# Altium PCB 20K Control Board V1.1.PcbDoc (part 23 of 24)
Units mm, origin at the board's own origin, x right, y up, seen from the top; angles counter-clockwise.
Board outline 132 x 260 mm, 4 copper layers (Top Layer, GND, VCC, Bottom Layer); 1384 components, 779 nets, 4515 pads, 1774 vias.
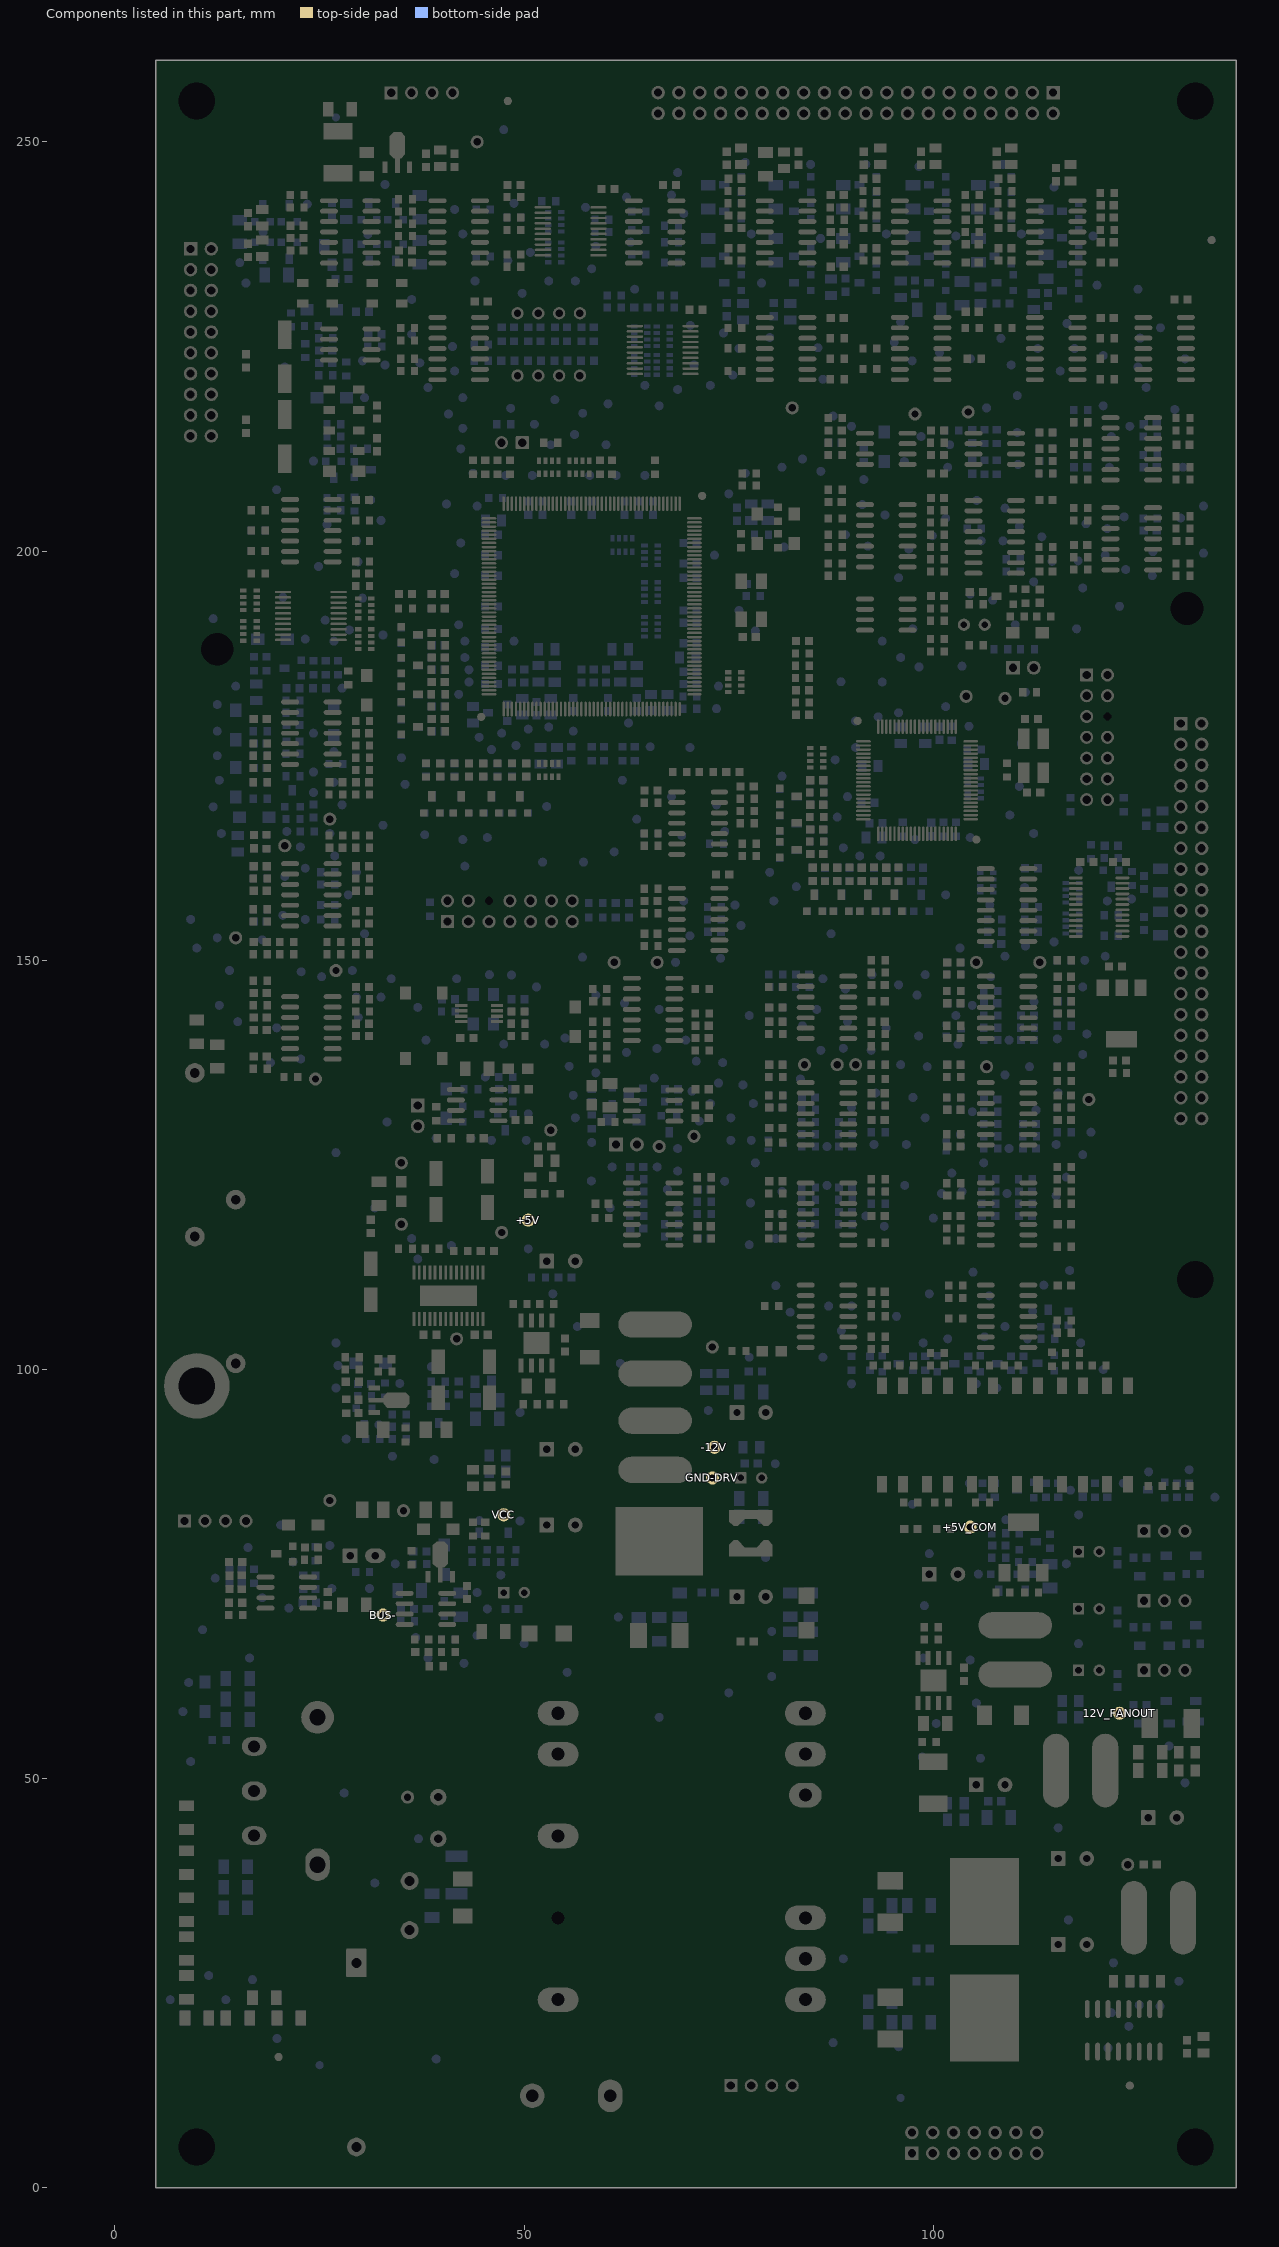
[diagram p25: the components of this part, seen from the top]

## Via types
v1: diameter 0.8, hole 0.4, Top Layer to Bottom Layer, tented both sides, 1354 vias
v2: diameter 1.2, hole 0.7, Top Layer to Bottom Layer, 261 vias
v3: diameter 0.8, hole 0.4, Top Layer to Bottom Layer, 58 vias
v4: diameter 1.2, hole 0.7, Top Layer to Bottom Layer, tented top, 58 vias
v5: diameter 0.8, hole 0.4, Top Layer to Bottom Layer, tented top, 22 vias
v6: diameter 1.2, hole 0.7, Top Layer to Bottom Layer, tented both sides, 13 vias
v7: diameter 1.2, hole 0.7, Top Layer to Bottom Layer, tented bottom, 8 vias

## Nets (pads, with @x,y where several pads share a name; then routed paths per layer and width w, separated by ;. In a path a pad name is that pad's centre, name@x,y a point inside that pad or via, vN(x,y) a via of type N, cw(c..) or ccw(c..) an arc to the next point about the centre after c; other vN are vias at no path point) (continued)
pads on no net: CNC3.6 CNC26.6 CNC27.1 MARK1.1 MARK2.1 MARK3.1 MARK4.1 MARK5.1 MARK6.1 MARK7.1 MARK8.1 MARK9.1 MARK10.1 MARK11.1 MARK12.1 QA5-HS.1 QA5-HS.2 SC1.1 SC2.1 SC3.1 SC4.1 SC5.1 SC7.1 SC8.1 TA1.6 UA10.2 UA10.3 UA11.2 UA11.3 UC4.23 UC20.81 UC20.82 UC20.149 UC23.8 UC46.1 UC46.2 UC46.7 UC46.8 UC46.13 UC46.14 UC46.15 UC46.16 UC46.19 UC46.20 UC46.21 UC46.26 UC46.27 UC73.38

## Polygon pours and split planes (outlines as drawn)
EARTH on Bottom Layer "EARTH" (solid, remove dead copper, pour order 1007): 15.25,102.5 16,101.75 16,98.25 11.75,94 6.75,94 6,94.75 6,101.75 6.75,102.5
GND on Bottom Layer "GND" (solid, remove dead copper, pour order 1001): 114,180.75 114.75,180 114.75,169.5 114,168.75 110.5,168.75 108,171.25 108,179 109.75,180.75
GND_S on Bottom Layer "GND-S" (solid, remove dead copper, pour order 1007): 82.25,35.25 86.25,35.25 87,34.5 87,31.5 86.25,30.75 82.25,30.75 81.75,31.25 81.75,34.75
NetCA104_1 on Bottom Layer "CA104-1" (solid, remove dead copper, pour order 1002): 94.75,37.75 97,37.75 97.5,37.25 97.5,32.5 96,31 94.5,31 94.25,31.25 94.25,37.25
NetCA91_1 on Bottom Layer "CA91-1" (solid, remove dead copper, pour order 1003): 94.5,23.75 95.5,23.75 97.5,21.75 97.5,16.75 97,16.25 94.75,16.25 94.25,16.75 94.25,23.5
NetCA77_2 on Bottom Layer "CA77-2" (solid, remove dead copper, pour order 1002): 54.25,115.25 54.5,115 54.5,112 54.75,111.75 54.75,110.75 54.5,110.5 52,110.5 51.75,110.75 51.75,114.75 52.25,115.25
GND on Bottom Layer "GND" (solid, remove dead copper, pour order 1005): 60.25,107.75 61,107 61,101.25 60,100.25 49.05,100.25 48.75,100.55 48.75,107.25 49.25,107.75
GND-DRV on Bottom Layer "GND-DRV" (solid, remove dead copper, pour order 1003): 49.5,90.25 49.75,90 49.75,86.75 49.5,86.5 47.55,86.5 47.25,86.8 47.25,90 47.5,90.25
GND on Bottom Layer "GND" (solid, remove dead copper, pour order 1004): 42.75,90.25 42.5,90 42.5,86.75 42.75,86.5 46.25,86.5 46.5,86.75 46.5,90 46.25,90.25
NetDA8_2 on Bottom Layer "DA8-2" (solid, remove dead copper, pour order 1002): 38.5,43.75 40.75,43.75 43.25,41.25 43.25,40 43,39.75 40,39.75 38,41.75 38,43.5 38.25,43.75
NetCA70_1 on Bottom Layer "CA70-1" (solid, remove dead copper, pour order 1001): 36.75,39.5 39,37.25 43.25,37.25 43.5,37 43.5,35.5 43,35 34,35 33.25,35.75 33.25,38.75 34,39.5
BUS+ on Bottom Layer "BUS+" (solid, remove dead copper, pour order 1000): 31,32.25 32.75,32.25 34.25,33.75 37.5,33.75 40.95,33.75 41,33.75 44,30.75 43.25,30 35.5,30 32.25,30 30.5,31.75
GND-DRV on Bottom Layer "GND-DRV" (solid, remove dead copper, pour order 1000): 72.25,89.25 71.75,88.75 71.75,85.75 73,84.5 73,82.25 73,80.5 77.25,80.5 77.5,80.75 77.5,89 77.25,89.25
GND-DRV on Bottom Layer "GND-DRV" (solid, remove dead copper, pour order 1001): 73,71.75 73.5,71.25 76.75,71.25 77.5,72 77.5,82.25 73,82.25
GND on Bottom Layer "GND" (solid, remove dead copper, pour order 1001): 47.25,120 48.25,119 48.25,114.75 46.25,112.75 42,112.75 42,115.75 40,117.75 37,117.75 36.75,118 36.75,119.75 37,120
GND on Bottom Layer "GND" (solid, remove dead copper, pour order 1000): 74.5,198.25 79.75,198.25 80.5,197.5 80.5,189 79.75,188.25 74.75,188.25 74,189 74,197.75 74.5,198.25
NetCA6_1 on Bottom Layer "CA83-1" (solid, remove dead copper, pour order 1009): 81.5,70.5 81.5,67.5 81.75,67.25 85.75,67.25 86,67.5 86,70.25 85.75,70.5
+5V on Bottom Layer "+5V" (solid, remove dead copper, pour order 1006): 41.25,104.5 43.25,104.5 44.75,103 44.75,101.5 44.5,101.25 41.75,101.25 41,102 40.75,102.25 40.75,104 41.25,104.5
+12V_FB on Bottom Layer "+12V-FB" (solid, remove dead copper, pour order 1005): 52.25,95.25 49.75,92.75 49.75,79.75 57.5,72 72.25,72 72.5,72.25 72.5,84.25 64.75,92 64.75,94.5 64,95.25
+12V on Bottom Layer "+12V" (solid, remove dead copper, pour order 1001): 72,103.75 74.5,103.75 75,103.25 75,99.25 74.75,99 71.75,99 71.5,99.25 71.5,103.25 72,103.75
NetCA73_2 on Bottom Layer "CA73-2" (solid, remove dead copper, pour order 1000): 72,98 75.25,98 75.75,98.5 75.75,99.75 76.25,100.25 78,100.25 78,99 77,98 77,94.25 76.5,93.75 72.25,93.75 71.5,94.5 71.5,97.5
NetDA13_1 on Bottom Layer "DA13-1" (solid, remove dead copper, pour order 1014): 88.25,30.25 89.25,31.25 89.25,35.25 91.5,37.5 92.5,37.5 93,37 93,26.5 92.25,25.75 82.25,25.75 81.75,26.25 81.75,29.75 82.25,30.25
NetRC185_2 on Bottom Layer "RC185-2" (solid, remove dead copper, pour order 1008): 14.25,122 8.75,122 8,121.25 8,115.5 8.5,115 11,115 16,120 16,121.5 15.5,122
GND_S on Bottom Layer "GND-S" (solid, remove dead copper, pour order 1000): 108.25,51.5 111,51.5 111.5,51 111.5,45 110.75,44.25 108,44.25 107.75,44.5 107.75,51 108.25,51.5
NetCA68_1 on Bottom Layer "CA68-1" (solid, remove dead copper, pour order 1023): 63,70.5 70,70.5 70.25,70.25 70.25,69.5 70.25,69.25 70,69 62.75,69 62.5,69.25 62.5,70.25 62.75,70.5
NetCA82_2 on Bottom Layer "CA82-2" (solid, remove dead copper, pour order 1022): 78.5,91.5 80.75,91.5 81.5,90.75 81.5,81.25 80.75,80.5 78.75,80.5 78.25,80.5 78,80.75 78,91.25 78.25,91.5
GND-DRV on Bottom Layer "GND-DRV" (solid, remove dead copper, pour order 1021): 86.25,54.5 80.75,54.5 76.75,58.5 76.75,65.25 76.75,73.75 76.25,74.25 73.5,74.25 73,73.75 73,56.75 78.25,51.5 86.75,51.5 87,51.75 87,54.25 86.75,54.5
NetDA5_1 on Bottom Layer "DA5-1" (solid, remove dead copper, pour order 1020): 63,67.5 69.5,67.5 70.25,66.75 70.25,56 76.75,49.5 86.25,49.5 86.5,49.25 86.5,47.25 85.5,46.25 71.75,46.25 62.5,55.5 62.5,67 63,67.5
BUS+ on Bottom Layer "BUS+" (solid, remove dead copper, pour order 1015): 25 vertices, not listed, extent 26.75,9.75 57.5,32.25
GND_FAN on Bottom Layer "GND-FAN" (solid, remove dead copper, pour order 1013): 117.5,60.25 120,60.25 121,59.25 121.25,59 121.25,57.75 121.25,57 121,56.75 117.5,56.75 117.25,57 117.25,60 117.5,60.25
GND_S on Bottom Layer "GND-S" (solid, remove dead copper, pour order 1012): 112.75,60.25 112.25,59.75 112.25,56.75 112.5,56.5 116,56.5 116.25,56.75 116.25,60 116,60.25
GND_S on Bottom Layer "GND-S" (solid, remove dead copper, pour order 1011): 96.5,29.75 95.25,28.5 95.25,26 96.5,24.75 98.5,24.75 98.5,26.5 98.75,26.75 98.75,28.25 98.5,28.5 98.5,29.75
GND_S on Bottom Layer "GND-S" (solid, remove dead copper, pour order 1008): 97.25,68.5 98,69.25 103.25,69.25 104,68.5 104,60 103.5,59.5 98.25,59.5 97.25,60.5
NetFA3_2 on Bottom Layer "FA3-2" (solid, remove dead copper, pour order 1007): 101.75,49.75 102.25,49.25 102.25,44.5 102,44.25 98.5,44.25 98.25,44.5 98.25,49.5 98.5,49.75
NetCA98_1 on Bottom Layer "CA98-1" (solid, remove dead copper, pour order 1006): 106.75,51.5 107.25,51 107.25,44.5 107,44.25 103.5,44.25 103.25,44.5 103.25,51 103.75,51.5
NetCA92_1 on Bottom Layer "CA92-1" (solid, remove dead copper, pour order 1004): 126.75,29 126.75,38.5 124,41.25 124,46.5 124.5,47 127.75,47 128.5,46.25 128.5,44 132.25,40.25 132.25,29 131.5,28.25 127.5,28.25
NetDA11_1 on Bottom Layer "DA11-1" (solid, remove dead copper, pour order 1000): 82.25,24.5 92,24.5 92.75,23.75 92.75,16.25 92,15.5 82.5,15.5 81.75,16.25 81.75,24 82.25,24.5
NetDA10_2 on Bottom Layer "DA10-2" (solid, remove dead copper, pour order 1008): 82,65.75 85.75,65.75 86,65.5 86,59.5 87,58.5 87,57 86.5,56.5 81.75,56.5 81,57.25 81,65.25 81.5,65.75
NetCA1_2 on Bottom Layer "CA1-2" (solid, remove dead copper, pour order 1010): 112.5,30.75 112.5,33 115,35.5 119.75,35.5 121.75,37.5 122.5,37.5 123,37 123,31.75 122.5,31.25 117.5,31.25 117,30.75 116.25,30 114.25,30 112.5,30
NetCA2_1 on Bottom Layer "CA2-1" (solid, remove dead copper, pour order 1010): 99,41.25 101.25,43.5 114.25,43.5 116,41.75 116,38 111.5,33.5 111.5,28.75 110.5,27.75 100,27.75 99,28.75
NetCA2_1 on Bottom Layer "1" (solid, remove dead copper, pour order 1005): 110,42.25 113.25,45.5 122.5,45.5 123,45 123,40.75 118.75,36.5 111.75,36.5 109.5,38.75 109.5,42.25
NetCA1_2 on Bottom Layer "CA1-2" (solid, remove dead copper, pour order 1011): 113,31.25 116.5,31.25 117,30.75 117,13 115.5,11.5 99.75,11.5 99,12.25 99,25.75 100,26.75 111,26.75 112.5,28.25 112.5,30.75
NetCA1_2 on Bottom Layer "CA1-2" (solid, remove dead copper, pour order 1012): 117,29.25 117,28.5 117.75,27.75 120,25.5 120,22.25 120,16 117,13 115.5,11.5 114.25,11.5 114.25,29.25
BUS- on Bottom Layer "BUS-" (solid, remove dead copper, pour order 1048): 62.25,13.75 62.75,13.25 62.75,2.75 61,1 26.5,1 25.75,1.75 25.75,7 26.25,7.5 30.25,7.5 33.75,4 57.25,4 59,5.75 59,13 59.75,13.75
BUS- on Bottom Layer "BUS-" (solid, remove dead copper, pour order 1016): 51.5,55 50,56.5 50,64.25 49.25,65 45.5,65 45,64.5 45,56 50,51 57.25,51 57.5,51.25 57.5,54.75 57.25,55
BUS- on Bottom Layer "BUS-" (solid, remove dead copper, pour order 1017): 11.75,40.5 11.25,40 11.25,29.25 11.75,28.75 16.25,28.75 16.5,29 16.5,31.5 16.25,31.75 14.75,31.75 14,32.5 14,40.25 13.75,40.5
NetCA79_1 on Bottom Layer "CA79-1" (solid, remove dead copper, pour order 1018): 47.5,73.75 46.75,73.75 45.75,72.75 43.5,70.5 42.75,70.5 40,70.5 39.75,70.25 39.75,69.25 40,69 47.25,69 48.25,70 48.25,73.5 48,73.75
NetCA4_1 on Bottom Layer "CA4-1" (solid, remove dead copper, pour order 1018): 78.75,78.75 81.75,78.75 86,74.5 86,72 81,72 80.25,71.25 78.75,71.25 78.25,71.75 78.25,78.25
1.5VREF on Bottom Layer "1.5VREF" (solid, remove dead copper, pour order 1000): 120.5,136.25 122,136.25 122.5,135.75 122.5,134.3 122.2,134 120,134 119.5,134.5 119.5,135.25 120.5,136.25
GND on Bottom Layer "GND" (solid, remove dead copper, pour order 1004): 48.25,108.5 49,107.75 54,107.75 54.75,107 54.75,101.5 53.5,100.25 46.5,100.25 45.5,101.25 45.5,103.5 43.75,105.25 41.25,105.25 41.25,110.75 42.25,111.75 48.25,111.75
GND on Bottom Layer "GND" (solid, remove dead copper, pour order 1019): 40.75,111.75 29.5,111.75 28.25,110.5 28.25,105.25 29,104.5 40.5,104.5 41.25,105.25 46,105.25 48.25,107.5 48.25,115 48,115.25 44.25,115.25
-12V on Bottom Layer "-12V" (solid, remove dead copper, pour order 1002): 77.25,90.5 77.25,92.75 77,93 76.75,93.25 69.5,93.25 69.286,93.25 69.018,92.982 69.018,90.982 70.25,89.75 77,89.75 77.25,90
GND on Bottom Layer "GND" (solid, remove dead copper, pour order 1003): 46.75,208.25 66.25,208.25 70.583,203.917 70.583,182.633 69.45,181.5 47,181.5 45.75,182.75 45.75,207.25 46.75,208.25
GND on Bottom Layer "GND" (solid, remove dead copper, pour order 1004): 94.25,177.5 103.75,177.5 104.75,176.5 104.75,167.25 103.75,166.25 92.5,166.25 91.75,167 91.75,176.25 93,177.5
NetDA9_1 on Bottom Layer "DA9-1" (solid, remove dead copper, pour order 1000): 53.75,69 57,69 57.75,68.25 57.75,57.75 56.5,56.5 52.25,56.5 51.5,57.25 51.5,63.75 53.5,65.75 53.5,68.75 53.75,69
GND-DRV on Bottom Layer "GND-DRV" (solid, remove dead copper, pour order 1006): 78.5,100.25 80.25,100.25 81.25,99.25 81.25,94.5 80.5,93.75 78.25,93.75 78,94 78,96.25 78.5,96.75
+5V on Bottom Layer "+5V" (solid, remove dead copper, pour order 1005): 77.25,109 85.25,101 88.75,101 89,100.75 89,97.25 88.75,97 84.5,97 74.75,106.75 70.5,106.75 70.25,107 70.25,108.75 70.5,109
+5V on Bottom Layer "+5V" (solid, remove dead copper, pour order 1003): 49.5,112 51,112 51.25,111.75 51.25,110.5 51.5,110.25 51.5,108.75 51.25,108.5 49.25,108.5 49,108.75 49,111.5
V19D on Bottom Layer "V19D" (solid, remove dead copper, pour order 1000): 39.75,117.25 40,117 40,114.5 39.75,114.25 35,114.25 33,112.25 31.25,112.25 30.5,113 30.5,116.5 31,117 31.25,117.25
V33D on Bottom Layer "V33D" (solid, remove dead copper, pour order 1001): 32.75,136.25 34.75,136.25 35.25,135.75 35.25,135.25 35,135 34.5,134.5 34.5,134 34.5,131.25 34.25,131 31.5,131 31.25,131.25 31.25,134.75 32.75,136.25
NetDA8_1 on Bottom Layer "DA8-1" (solid, remove dead copper, pour order 1036): 43,49.75 47.5,45.25 56.5,45.25 57.5,44.25 57.5,41 56.75,40.25 48.75,40.25 42.25,46.75 23,46.75 22.5,47.25 16.25,47.25 15.5,48 15.5,49 16.25,49.75
NetQA5_3 on Bottom Layer "QA5-3" (solid, remove dead copper, pour order 1000): 15.75,44.25 14.55,43.05 13.5,43.05 12.75,43.05 15.5,40.3 15.5,39.5 15.75,39.5 17.5,39.5 17.5,40.75 18.5,41.75 18.5,43.75 18,44.25
NetQA5_3 on Bottom Layer "QA5-3" (solid, remove dead copper, pour order 1005): 18,44.25 18.5,43.75 18.5,41.75 18,41.25 18,34 17.25,33.25 16,33.25 15.5,33.75 15.5,44 15.75,44.25
EARTH on Top Layer "EARTH" (solid, remove dead copper, pour order 1013): 15.25,102.5 16,101.75 16,98.25 11.75,94 6.75,94 6,94.75 6,101.75 6.75,102.5
GND on Top Layer "GND" (solid, remove dead copper, pour order 1003): 27 vertices, not listed, extent 28.25,95 48.25,111.25
GND on Top Layer "GND" (solid, remove dead copper, pour order 1003): 108,179 108,175.5 105.75,173.25 106,173.25 110.5,168.75 114,168.75 114.75,169.5 114.75,180 114,180.75 109.75,180.75
GND_S on Top Layer "GND-S" (solid, remove dead copper, pour order 1025): 82.25,35.25 86.25,35.25 87,34.5 87,31.25 86.5,30.75 82.25,30.75 81.75,31.25 81.75,34.75
NetCC22_2 on Top Layer "CC22-2" (solid, remove dead copper, pour order 1038): 113,82.5 113.5,82 113.5,79 111.75,77.25 111.75,74.25 110.25,74.25 110.25,77.25 108.5,79 108.5,81.75 109.25,82.5
-12V on Top Layer "-12" (solid, remove dead copper, pour order 1006): 71.75,91.5 74.25,91.5 74.75,91 74.75,89.75 74.5,89.5 71.75,89.5 71.5,89.75 71.5,91.25
NetDA8_2 on Top Layer "DA8-2" (solid, remove dead copper, pour order 1005): 38.25,43.75 40.75,43.75 41.5,43 41.5,41.5 41.25,41.25 39.25,41.25 38.5,42 38,42.5 38,43.5
NetCA70_1 on Top Layer "CA70-1" (solid, remove dead copper, pour order 1004): 34,39.5 42.75,39.5 43.75,38.5 43.75,36.5 43.25,36 33.75,36 33.25,36.5 33.25,38.75
BUS+ on Top Layer "BUS+" (solid, remove dead copper, pour order 1003): 31.75,31 31.75,31.25 34.25,33.75 43.5,33.75 44,33.25 44,31 44,30.75 46,28.75 33.75,28.75 31.5,31
GND on Top Layer "GND" (solid, remove dead copper, pour order 1000): 28 vertices, not listed, extent 33.25,246.25 42.5,252.75
GND on Top Layer "GND" (solid, remove dead copper, pour order 1002): 75,198.25 79.75,198.25 80.5,197.5 80.5,189 79.75,188.25 74.5,188.25 74,188.75 74,197.75 74.5,198.25
GND on Top Layer "GND" (solid, remove dead copper, pour order 1018): 46,121.25 48,121.25 49,120.25 49,108.25 48,108.25 46,110.25
NetDA10_2 on Top Layer "DA10-2" (solid, remove dead copper, pour order 1049): 82.25,69.25 81,68 81,57.25 81.75,56.5 86.5,56.5 87,57 87,58.5 86,59.5 86,68.75 85.5,69.25
+5V on Top Layer "+5V" (solid, remove dead copper, pour order 1038): 20 vertices, not listed, extent 38.7,99.5 46.5,107
GND on Top Layer "GND" (solid, remove dead copper, pour order 1012): 18 vertices, not listed, extent 49.4,95.15 51.3,101.35
GND on Top Layer "GND" (solid, remove dead copper, pour order 1003): 93.75,177 102.5,177 103,176.5 103,167.5 102.5,167 93.25,167 93,167.25 93,176.25
NetRC185_2 on Top Layer "RC185-2" (solid, remove dead copper, pour order 1014): 14.25,122 8.75,122 8,121.25 8,115.5 8.5,115 11,115 16,120 16,121.5 15.5,122
GND on Top Layer "GND" (solid, remove dead copper, pour order 1012): 42.741,90.741 47.759,90.741 48.25,90.25 48.25,87.25 48,87 42.75,87 42.5,87.25 42.5,90.5 42.75,90.75
GND on Top Layer "GND" (solid, remove dead copper, pour order 1011): 41.6,105.4 41.6,107.3 40.9,108 43.2,108 42.5,107.3 42.5,105.4
GND on Top Layer "GND" (solid, remove dead copper, pour order 1010): 37.7,105.4 37.7,107.3 37,108 39.3,108 38.6,107.3 38.6,105.4
GND on Top Layer "GND" (solid, remove dead copper, pour order 1005): 47,121.25 47.5,120.75 47.5,118 48.25,117.25 48.25,108 47.75,107.5 45.75,107.5 45.25,108 45.75,108.5 45.75,116.75 44.75,117.75 44.75,121.25
NetCA82_2 on Top Layer "CA82-2" (solid, remove dead copper, pour order 1054): 78.75,88.25 81,88.25 81.5,87.75 81.5,81.25 81,80.75 80.75,80.5 77.5,80.5 75.5,80.5 75,81 75,84.75 75.5,85.25 77.5,85.25 78,85.75 78,88 78.25,88.25
NetDA5_1 on Top Layer "DA5-1" (solid, remove dead copper, pour order 1053): 76.75,49.5 70.25,56 70.25,69 69.75,69.5 63.25,69.5 62.5,68.75 62.5,55.5 71.75,46.25 85.5,46.25 86.5,47.25 86.5,49.25 86.25,49.5
GND-DRV on Top Layer "GND-DRV" (solid, remove dead copper, pour order 1052): 86.25,54.5 80.75,54.5 76.75,58.5 76.75,65.25 76.75,73.75 76.25,74.25 73.5,74.25 73,73.75 73,56.75 78.25,51.5 86.75,51.5 87,51.75 87,54.25 86.75,54.5
NetDA13_1 on Top Layer "DA13-1" (solid, remove dead copper, pour order 1046): 82.25,30.25 88.25,30.25 89.25,31.25 89.25,35.25 92.75,38.75 96.25,38.75 96.5,38.5 96.5,30 92.25,25.75 82.25,25.75 81.75,26.25 81.75,29.75
12V_FANOUT on Top Layer "+12V-FANOUT" (solid, remove dead copper, pour order 1045): 127.5,55 127.5,60.25 126.75,61 122.25,61 121.5,60.25 121.5,57.5 122.25,56.75 124,55 126.5,55 127.5,55
GND_S on Top Layer "GND-S" (solid, remove dead copper, pour order 1044): 110.25,59.5 109.75,59 109.75,56.75 110,56.5 114.5,56.5 115,57 115,59 114.5,59.5
NetCA90_2 on Top Layer "CA90-2" (solid, remove dead copper, pour order 1043): 20 vertices, not listed, extent 101.75,56.5 114.75,64.5
NetCA2_1 on Top Layer "CA2-1" (solid, remove dead copper, pour order 1042): 99,41.25 101.25,43.5 114.25,43.5 116,41.75 116,38.25 111.5,33.75 111.5,28.75 110.5,27.75 100,27.75 99,28.75
NetFA2_2 on Top Layer "FA2-2" (solid, remove dead copper, pour order 1040): 130.75,58.5 133,58.5 133.25,58.25 133.25,50.5 133,50.25 131.75,50.25 131.5,50.5 131.5,54 130.5,55 130.5,58.25
+5V_COM on Top Layer "+5V-COM" (solid, remove dead copper, pour order 1037): 105.25,82.75 105.75,82.25 105.75,79.75 105.5,79.5 102,79.5 101.75,79.75 101.75,82.5 102,82.75
+7V_COM on Top Layer "+7V.COM" (solid, remove dead copper, pour order 1034): 101,57.75 102.35,57.75 102.75,57.35 102.75,51.5 102.25,51 98.25,51 98.25,53 98.75,53.5 101,53.5 101.25,53.75 101.25,55.5 101,55.75
NetCA98_1 on Top Layer "CA98-1" (solid, remove dead copper, pour order 1033): 17 vertices, not listed, extent 103.25,46.25 116.75,55.5
+7V_COM on Top Layer "+7V.COM" (solid, remove dead copper, pour order 1032): 100.2,60.2 101.1,60.2 101.2,60.1 101.2,58.05 101.5,57.75 101.5,56.5 101,56.5 100.1,57.4 100.1,60.1
GND_S on Top Layer "GND-S" (solid, remove dead copper, pour order 1031): 98.9,60.2 99.6,60.2 99.7,60.1 99.7,56.1 100.8,55 100.8,54 100,54 99.9,54.1 99.9,54.8 98.2,56.5 98.2,57.6 98.8,58.2 98.8,60.1
NetFA3_2 on Top Layer "FA3-2" (solid, remove dead copper, pour order 1030): 98.5,49.75 101.75,49.75 102.25,49.25 102.25,44.55 101.95,44.25 100.25,44.25 98.5,44.25 98.25,44.5 98.25,49.5 98.5,49.75
NetCA92_1 on Top Layer "CA92-1" (solid, remove dead copper, pour order 1029): 127.25,28.75 127.25,38.5 126.75,39 126.75,40.25 124,43 124,46.25 124.75,47 127.75,47 128.5,46.25 128.5,44 132.25,40.25 132.25,29 131.5,28.25 127.75,28.25
NetCA92_1 on Top Layer "CA92-1" (solid, remove dead copper, pour order 1028): 130.2,54.25 130.5,53.95 130.5,48.25 127.75,45.5 124.25,45.5 124,45.75 124,46.25 127.25,49.5 127.25,54 127.5,54.25
NetDA11_1 on Top Layer "DA11-1" (solid, remove dead copper, pour order 1025): 82.5,24.5 96.25,24.5 96.5,24.25 96.5,16 96,15.5 82.5,15.5 81.75,16.25 81.75,24 82.25,24.5
GND-DRV on Top Layer "GND-DRV" (solid, remove dead copper, pour order 1026): 72.25,88.25 77,88.25 77.5,87.75 77.5,86 77.25,85.75 72,85.75 71.75,86 71.75,88 72,88.25
NetDA9_1 on Top Layer "DA9-1" (solid, remove dead copper, pour order 1027): 53.75,69 57,69 57.75,68.25 57.75,57.75 56.5,56.5 52.25,56.5 51.5,57.25 51.5,63.75 53.5,65.75 53.5,68.75 53.75,69
NetCA1_2 on Top Layer "CA1-2" (solid, remove dead copper, pour order 1029): 108.5,26.75 100,26.75 99,25.75 99,12.25 99.75,11.5 109.75,11.5 112.25,14 112.25,17.75 112,18 112,26.75
NetCA1_2 on Top Layer "CA1-2" (solid, remove dead copper, pour order 1030): 112.5,33 115,35.5 119.75,35.5 121.75,37.5 125.5,37.5 126,37 126,28.75 125.5,28.25 122.25,28.25 121.75,28.75 121.75,30.5 121,31.25 117.5,31.25 116.25,30 112.5,30
NetCA2_1 on Top Layer "CA2-1" (solid, remove dead copper, pour order 1031): 22 vertices, not listed, extent 108.5,27.75 123,55.5
NetCA1_2 on Top Layer "CA1-2" (solid, remove dead copper, pour order 1032): 117,30.75 117,13 115.5,11.5 107.25,11.5 107.25,25.5 108.5,26.75 111,26.75 112.5,28.25 112.5,30.75 113,31.25 116.5,31.25
NetCA79_1 on Top Layer "CA79-1" (solid, remove dead copper, pour order 1033): 46.75,73.75 48,73.75 48.25,73.5 48.25,71.75 47,70.5 45.5,69 45.5,68.5 45.5,66.75 45.25,66.5 44,66.5 43.75,66.75 43.75,70.75 45.5,72.5 46.75,73.75
BUS+ on Top Layer "BUS+" (solid, remove dead copper, pour order 1047): 24 vertices, not listed, extent 26.75,9.75 57.5,32.25
BUS- on Top Layer "BUS-" (solid, remove dead copper, pour order 1048): 62.25,13.75 62.75,13.25 62.75,2.75 61,1 26.5,1 25.75,1.75 25.75,7 26.25,7.5 30.25,7.5 33.75,4 57.25,4 59,5.75 59,13 59.75,13.75
BUS- on Top Layer "BUS-" (solid, remove dead copper, pour order 1035): 51.5,55 50,56.5 50,64.25 49.25,65 45.5,65 45,64.5 45,56 50,51 57.25,51 57.5,51.25 57.5,54.75 57.25,55
BUS- on Top Layer "BUS-" (solid, remove dead copper, pour order 1037): 47.85,86.25 48,86.1 48,84.5 46,82.5 43.5,82.5 42.75,83.25 42.75,86 43,86.25
NetCA4_1 on Top Layer "CA4-1" (solid, remove dead copper, pour order 1050): 81.25,79.25 86,74.5 86,71.75 85.5,71.25 78.75,71.25 78.25,71.75 78.25,79.25
NetCA4_1 on Top Layer "CA4-1" (solid, remove dead copper, pour order 1051): 77.5,66 77.5,75.25 80.5,75.25 81,74.75 81,71.25 79.5,69.75 79.5,66 79.25,65.75 77.75,65.75
NetCA4_1 on Top Layer "CA4-1" (solid, remove dead copper, pour order 1055): 83.5,76.5 83.5,73.75 79.5,69.75 78.25,71 78.25,74.5 77.25,75.5 75.5,75.5 75,76 75,78.75 75.5,79.25 80.75,79.25
GND on Top Layer "GND" (solid, remove dead copper, pour order 1003): 8.5,215 16.5,215 17.5,215 18,214.5 18.5,214 19.5,214 22.5,214 23.25,213.25 23.25,210.25 22.5,209.5 8.75,209.5 8,210.25 8,214.5 8.5,215
GND on Top Layer "GND" (solid, remove dead copper, pour order 1004): 8.5,220 12.5,220 12.75,219.75 12.75,218.5 12.5,218.25 8.5,218.25 8.25,218.25 8,218.5 8,219.75 8.25,220
-12V on Top Layer "-12V" (solid, remove dead copper, pour order 1005): 14,217.75 14.75,218.5 22.75,218.5 23.25,218 23.25,215 22.75,214.5 18.75,214.5 17.75,215.5 8.25,215.5 8,215.75 8,217.5 8.25,217.75
GND on Top Layer "GND" (solid, remove dead copper, pour order 1006): 8.75,225 13.5,225 17,228.5 20.25,228.5 22.5,228.5 23.25,227.75 23.25,224.25 22.5,223.5 8.25,223.5 8,223.75 8,224.75 8.25,225
1.5VREF on Top Layer "1.5VREF" (solid, remove dead copper, pour order 1007): 23 vertices, not listed, extent 119.5,135.25 126.75,148
1.5VREF on Top Layer "1.5VREF" (solid, remove dead copper, pour order 1008): 119.5,135.75 119.5,134.5 120,134 122.2,134 122.45,134.25 122.5,134.3 122.5,135.5 122.5,135.75 122.25,136 119.5,136
V33D on Top Layer "V33D" (solid, remove dead copper, pour order 1004): 20 vertices, not listed, extent 34.25,111 47.5,126
+12V_FB on Top Layer "+12V-FB" (solid, remove dead copper, pour order 1006): 72,84.75 70.5,86.25 70.5,88.75 70.5,89 70,89.5 60.5,89.5 59.5,88.5 59.5,73.25 60.75,72 70,72 72.75,74.75 72.75,84
+12V_FB on Top Layer "+12V-FB" (solid, remove dead copper, pour order 1007): 56.5,93.5 60.5,89.5 60.5,72.25 60.75,72 57.5,72 49.75,79.75 49.75,92 51.25,93.5
NetCA73_2 on Top Layer "CA73-2" (solid, remove dead copper, pour order 1008): 62,95.5 68.75,95.5 70.25,97 77,97 77.5,96.5 77.5,93 76.5,92 62,92 61.5,92.5 61.5,95
+12V on Top Layer "+12V" (solid, remove dead copper, pour order 1002): 22.75,223 23.25,222.5 23.25,219.5 22.75,219 15,219 13.5,220.5 8.25,220.5 8,220.75 8,222.75 8.25,223
V33D on Top Layer "V33D" (solid, remove dead copper, pour order 1010): 34.25,123.75 34.25,124.25 31.25,127.25 31.25,134.75 32.75,136.25 34.75,136.25 35.25,135.75 35.25,129.5 39.25,125.5 39.25,123.75
V19D on Top Layer "V19D" (solid, remove dead copper, pour order 1011): 31.25,137.25 31.5,137 31.5,136 30.25,134.75 30.25,117.5 31,116.75 31,111.5 26.75,115.75 26.75,135.75 28.25,137.25
NetCA69_2 on Top Layer "CA69-2" (solid, remove dead copper, pour order 1012): 54.5,102.7 60.05,102.7 60.75,102 70,102 70.5,101.5 70.5,98.5 69.75,97.75 59.5,97.75 57.75,99.5 53.5,99.5 53.25,99.75 53.25,101.3 53.6,101.3 54.5,102.2
GND on Top Layer "GND" (solid, remove dead copper, pour order 1015): 46.25,103.75 47,103 47,99 43,95 47.25,95 48,95.75 48,100.8 49,101.8 49,103.5 48.75,103.75
GND on Top Layer "GND" (solid, remove dead copper, pour order 1019): 23 vertices, not listed, extent 45,100.9 53.75,110
NetCA77_2 on Top Layer "CA77-2" (solid, remove dead copper, pour order 1013): 18 vertices, not listed, extent 51.5,103.75 70.5,114.5
+5V on Top Layer "+5V" (solid, remove dead copper, pour order 1020): 52.5,122 53,121.5 53,119.25 51,117.25 49.75,117.25 49.5,117.5 49.5,121.75 49.75,122
+12V on Top Layer "+12V" (solid, remove dead copper, pour order 1011): 52.5,101.35 52.6,101.25 52.6,99.4 53,99 57,99 58.25,97.75 58.25,95.75 57.75,95.25 54.5,95.25 54.5,96.5 54.25,96.75 52.5,96.75 51.75,97.5 51.75,101.25 51.85,101.35
GND on Top Layer "MCPU" (solid, remove dead copper, pour order 1001): 69,204.25 69.25,204 69.25,183.25 68.25,182.25 48.25,182.25 47.25,183.25 47.25,203.75 47.75,204.25
NetDA9_2 on Top Layer "DA9-2" (solid, remove dead copper, pour order 1028): 47.25,69 51.5,69 51.75,68.75 51.75,66.75 51,66 47.5,66 47,66.5 47,68.75
+12V on Top Layer "+12V" (solid, remove dead copper, pour order 1002): 72.25,103.75 75.25,103.75 75.75,103.25 75.75,101.5 75,100.75 74.5,100.25 73.75,100.25 72.5,100.25 72,100.75 72,103.5 72.25,103.75
GND_S on Top Layer "GND-S" (solid, remove dead copper, pour order 1035): 102.25,63.5 102.5,63.25 102.5,61.25 101.756,60.506 99.906,60.506 99.7,60.3 99.7,59.585 98.815,59.585 98.8,59.6 98.8,60.3 98.6,60.5 97.75,60.5 97.25,61 97.25,63.25 97.5,63.5
NetCA102_2 on Top Layer "CA102-2" (solid, remove dead copper, pour order 1036): 97.5,81 97.75,81.25 100.75,81.25 101,81 101,73.5 103.75,70.75 114,70.75 114.75,70 114.75,67.5 113.5,66.25 104.75,66.25 102.75,68.25 100.25,68.25 100.25,69.5 97.5,72.25
V19D on Top Layer "V19D" (solid, remove dead copper, pour order 1000): 39,111 39.9,111 39.9,113.4 40.5,114 40.5,116.5 39.75,117.25 30.5,117.25 30.5,111.5 32.75,111.5 33.75,112.5 33.75,115.25 34.25,115.75 38.5,115.75 39,115.25
NetDA8_1 on Top Layer "DA8-1" (solid, remove dead copper, pour order 1036): 43,49.75 47.5,45.25 56.5,45.25 57.5,44.25 57.5,41 56.75,40.25 48.75,40.25 42.25,46.75 23,46.75 22.5,47.25 16.25,47.25 15.5,48 15.5,49 16.25,49.75
BUS- on GND "BUS-" (solid, remove dead copper, pour order 1042): 24 vertices, not listed, extent 6,29 45,85.5
GND-DRV on GND "GND-DRV" (solid, remove dead copper, pour order 1016): 25 vertices, not listed, extent 49.75,51.5 87,99
NetDA10_2 on GND "DA10-2" (solid, remove dead copper, pour order 1003): 81,57.5 81,63.5 81.75,64.25 85.5,64.25 86,63.75 86,59.5 87,58.5 87,57 86.5,56.5 81.75,56.5 81,57.25
NetDA5_1 on GND "DA5-1" (solid, remove dead copper, pour order 1002): 86.25,49.5 76.75,49.5 70.25,56 70.25,65 69.75,65.5 63,65.5 62.5,65 62.5,55.5 71.75,46.25 85.5,46.25 86.5,47.25 86.5,49.25
GND on GND "GND" (solid, remove dead copper, pour order 1015): 17 vertices, not listed, extent 8.25,97 136,259
GND on GND "GND" (solid, remove dead copper, pour order 1001): 72.092,101 51.5,101 47,96.5 47,90 45.5,88.5 38.5,88.5 36.75,90.25 36.75,95 30.353,101.397 30.353,103.5 52.5,103.5
GND_S on GND "GND-S-5" (solid, remove dead copper, pour order 1061): 17 vertices, not listed, extent 76.75,1 136,86.75
GND_S on GND "GND-S" (solid, remove dead copper, pour order 1059): 17 vertices, not listed, extent 81.75,19 98.75,35.5
+12V_FB on GND "+12V-FB" (solid, remove dead copper, pour order 1015): 72.25,84 71.5,84.75 58.5,84.75 57.75,84 57.75,78.25 57.25,77.75 55,77.75 54.5,77.25 54.5,75 57.5,72 72,72 72.25,72.25
NetCA2_1 on GND "CA2-1" (solid, remove dead copper, pour order 1060): 112.25,43.5 113.25,42.5 113.25,35.25 108.25,30.25 99.5,30.25 99,30.75 99,41.25 101.25,43.5
NetCA1_2 on GND "CA1-2" (solid, remove dead copper, pour order 1058): 115.5,24.5 116,24 116,14 113.5,11.5 99.75,11.5 99,12.25 99,24 99.5,24.5
BUS- on GND "BUS-" (solid, remove dead copper, pour order 1048): 18 vertices, not listed, extent 27,1 62.75,13.75
BUS- on GND "BUS-" (solid, remove dead copper, pour order 1040): 43.75,4 41.5,4 23.25,22.25 15.5,30 7,30 6.5,30 6,29.5 6,6 11,1 36.75,1 43.75,1
BUS- on GND "BUS-" (solid, remove dead copper, pour order 1041): 51.5,55 50,56.5 50,64.25 49.25,65 45.5,65 45,64.5 45,56 50,51 57.25,51 57.5,51.25 57.5,54.75 57.25,55
BUS- on GND "BUS-" (solid, remove dead copper, pour order 1044): 47.5,85.5 48,85 48,79.25 51.75,75.5 51.75,66 50,64.25 50,61.75 45.25,61.75 44,63 38.5,63 38.5,84.75 39.25,85.5
GND-DRV on GND "GND-DRV" (solid, remove dead copper, pour order 1017): 49,95.25 48,94.25 48,86.5 50.5,84 56.5,84 56.75,84.25 56.75,95.25
GND_FAN on GND "4" (solid, remove dead copper, pour order 1057): 131.5,82.25 133,80.75 133,58.25 131.5,56.75 116,56.75 115.5,57.25 115.5,70.25 114.25,71.5 106.25,71.5 105.5,72.25 105.5,81.25 106.5,82.25
NetDA8_1 on GND "DA8-1" (solid, remove dead copper, pour order 1036): 43,49.75 47.5,45.25 56.5,45.25 57.5,44.25 57.5,41 56.75,40.25 48.75,40.25 42.25,46.75 23,46.75 22.5,47.25 16.25,47.25 15.5,48 15.5,49 16.25,49.75
+5V_COM on VCC "+5V-COM" (solid, remove dead copper, pour order 1069): 133.25,28.5 132.452,27.702 136,27.702 136,85 134.25,86.75 101.75,86.75 100.5,85.5 100.5,79.5 101.25,78.75 111.75,78.75 114.5,81.5 127.25,81.5 127.75,81 127.75,60.5 133.25,55
12V_FANOUT on VCC "+12V-FANOUT" (solid, remove dead copper, pour order 1067): 123,79.75 124,78.75 124,62.5 127.5,59 127.5,55.5 127,55 124,55 121.5,57.5 121.5,59.25 120.75,60 116.5,60 115.5,61 115.5,79 116.25,79.75
-12V on VCC "-12V" (solid, pour order 1001): 17 vertices, not listed, extent 12.5,78 28,90
VREF-5V on VCC "VREF-5V" (solid, remove dead copper, pour order 1055): 47.5,85.25 48,84.75 48,79.25 51.75,75.5 51.75,66 48.75,63 36.25,63 34.75,64.5 34.75,67 32.75,69 14,69 13.25,69.75 13.25,72 26.5,85.25
+12V on VCC "+12V" (solid, pour order 1000): 17 vertices, not listed, extent 10,80.5 19.5,86.75
+12V on VCC "+12V" (solid, remove dead copper, pour order 1004): 17 vertices, not listed, extent 8.25,92.75 77.25,151.25
1.5VREF on VCC "1.5VREF" (solid, remove dead copper, pour order 1009): 120,136.5 122.25,136.5 122.5,136.25 122.5,134.3 122.2,134 120,134 119.5,134.5 119.5,136 119.75,136.25
+12V on VCC "+12V-2" (solid, remove dead copper, pour order 1024): 72.5,249 74,250.5 128,250.5 136,242.5 136,183.25 135,182.25 126.75,182.25 125.5,183.5 125.5,226.5 123.25,228.75 74.5,228.75 72.5,230.75
GND-DRV on VCC "GND-DRV" (solid, remove dead copper, pour order 1007): 86.5,55.75 81,55.75 80,56.75 80,88.5 79.75,88.75 71.25,88.75 70.75,88.25 70.75,86.75 73,84.5 73,56.75 78.25,51.5 86.75,51.5 87,51.75 87,55.25
+12V on VCC "+12V-2" (solid, remove dead copper, pour order 1024): 19 vertices, not listed, extent 6,138.5 43.25,252
NetDA10_2 on VCC "DA10-2" (solid, remove dead copper, pour order 1008): 81,57.5 81,63.5 81.75,64.25 85.5,64.25 86,63.75 86,59.5 87,58.5 87,57 86.5,56.5 81.75,56.5 81,57.25
NetDA5_1 on VCC "DA5-1" (solid, remove dead copper, pour order 1006): 86.25,49.5 76.75,49.5 70.25,56 70.25,65 69.75,65.5 63,65.5 62.5,65 62.5,55.5 71.75,46.25 85.5,46.25 86.5,47.25 86.5,49.25
+12V on VCC "+12V-1" (solid, remove dead copper, pour order 1005): 25 vertices, not listed, extent 67.75,96.25 136,184.25
GND on VCC "GND" (solid, remove dead copper, pour order 1026): 30.75,111.75 40.75,111.75 44.25,115.25 47.75,115.25 48.25,114.75 48.25,109.75 43.75,105.25 41.25,105.25 40.5,104.5 30.75,104.5 30,105.25 30,111
+5V on VCC "+5V" (solid, remove dead copper, pour order 1005): 73.25,228 120,228 123.5,224.5 123.5,197.25 121.25,195 104,195 103.25,195.75 103.25,216.5 100.75,219 75,219 71.75,222.25 71.75,226.5
+5V on VCC "+5V" (solid, remove dead copper, pour order 1029): 49.5,120.25 51.5,120.25 52.5,119.25 52.5,118.75 51.25,117.5 51.25,111.25 52,110.5 52,109.25 51.75,109 49.25,109 49,109.25 49,119.75
+5V on VCC "+5V" (solid, remove dead copper, pour order 1027): 49.5,112.75 51,112.75 51.25,112.5 51.25,111.25 52,110.5 52,108 45,101 40.75,101 40.25,101.5 40.25,103.5 41.35,104.6 44.35,104.6 49,109.25 49,112.25
GND_S on VCC "GND-S" (solid, remove dead copper, pour order 1068): 18 vertices, not listed, extent 81.75,25.5 98.75,35.25
NetFA3_2 on VCC "FA3-2" (solid, remove dead copper, pour order 1066): 101.75,49.75 102.25,49.25 102.25,45.25 101.25,44.25 98.5,44.25 98.25,44.5 98.25,49.5 98.5,49.75
GND_S on VCC "GND-S" (solid, remove dead copper, pour order 1065): 97.25,68.5 98,69.25 103.25,69.25 104,68.5 104,60 103.5,59.5 98.25,59.5 97.25,60.5
NetCA92_1 on VCC "CA92-1" (solid, remove dead copper, pour order 1064): 126.75,29 126.75,38.5 124,41.25 124,46.5 124.5,47 127.75,47 128.5,46.25 128.5,44 132.25,40.25 132.25,29 131.5,28.25 127.5,28.25
NetCA1_2 on VCC "CA1-2" (solid, remove dead copper, pour order 1045): 112.5,30.75 112.5,33 115,35.5 119.75,35.5 121.75,37.5 122.5,37.5 123,37 123,31.75 122.5,31.25 117.5,31.25 117,30.75 116.25,30 114.25,30 112.5,30
NetCA2_1 on VCC "CA2-1" (solid, remove dead copper, pour order 1070): 99,41.25 104.75,47 116,47 116,38 111.5,33.5 111.5,28.75 110.5,27.75 100,27.75 99,28.75
NetCA2_1 on VCC "1" (solid, remove dead copper, pour order 1071): 110,42.25 114.75,47 121,47 123,45 123,40.75 118.75,36.5 111.75,36.5 109.5,38.75 109.5,42.25
NetCA1_2 on VCC "CA1-2" (solid, remove dead copper, pour order 1046): 113,31.25 116.5,31.25 117,30.75 117,13 115.5,11.5 99.75,11.5 99,12.25 99,25.75 100,26.75 111,26.75 112.5,28.25 112.5,30.75
NetCA1_2 on VCC "CA1-2" (solid, remove dead copper, pour order 1047): 117,29.25 117,28.5 117.75,27.75 120,25.5 120,22.25 120,16 117,13 115.5,11.5 114.25,11.5 114.25,29.25
+5V_COM on VCC "+5V-COM" (solid, remove dead copper, pour order 1048): 19 vertices, not listed, extent 109,5.5 136,30.5
BUS- on VCC "BUS-" (solid, remove dead copper, pour order 1048): 62.25,13.75 62.75,13.25 62.75,2.75 61,1 26.5,1 25.75,1.75 25.75,7 26.25,7.5 30.25,7.5 33.75,4 57.25,4 59,5.75 59,13 59.75,13.75
V19D on VCC "V19D" (solid, remove dead copper, pour order 1006): 39.75,117.25 40.5,116.5 40.5,114.25 40.25,114 35.25,114 33.5,112.25 31.25,112.25 30.5,113 30.5,116.5 31,117 31.25,117.25
+12V_FB on VCC "+12V-FB" (solid, remove dead copper, pour order 1018): 64,92.75 72.25,84.5 72.25,72.25 72,72 57.5,72 49.75,79.75 49.75,92 50.5,92.75
V33A on VCC "V33A" (solid, remove dead copper, pour order 1012): 56,173 81.75,173 81.75,163.5 81,162.75 78.25,165.5 49.25,165.5 49,165.75 49,177.25 49.25,177.5 51.5,177.5
V33A on VCC "V33A" (solid, remove dead copper, pour order 1011): 88.75,173 91.5,170.25 91.5,163.947 92.197,163.25 99.25,163.25 100.5,162 100.5,155.715 99.035,154.25 84.5,154.25 80,158.75 80,172.5 80.5,173
V33D on VCC "V19D" (solid, remove dead copper, pour order 1024): 38 vertices, not listed, extent 24,153.5 107.75,245.5
V33D on VCC "V33D" (solid, remove dead copper, pour order 1016): 77.75,164.75 79,163.5 79,158.75 84.25,153.5 100.044,153.5 100.044,146.044 100,146 60,146 58.75,144.75 58.75,164.5 59,164.75
+5V on VCC "+5V" (solid, remove dead copper, pour order 1017): 55.25,117.5 55.25,111.25 52,108 50.75,109.25 49,109.25 49,117.5 47.25,119.25 56,119.25 56.5,118.75
+5V on VCC "+5V" (solid, remove dead copper, pour order 1018): 63.999,126.249 59,121.25 59,108.75 49.5,108.75 49.5,120.5 55.25,126.25
+5V on VCC "+5V" (solid, remove dead copper, pour order 1019): 66,108.75 68,106.75 72.75,106.75 73.5,107.5 73.5,111.25 71.25,113.5 62.25,113.5 59,116.75 50.542,116.75 49,115.208 49,109.75 50,108.75
V33D on VCC "V33D" (solid, remove dead copper, pour order 1004): 101.5,162 101.5,155.5 99.001,153.001 99.001,146.999 100,146 108.75,146 112.75,150 112.75,166.25 107.25,171.75 104.25,171.75 103.75,171.25 103.75,164.25
+5V on VCC "+5V" (solid, remove dead copper, pour order 1020): 22 vertices, not listed, extent 47.25,117.5 124.5,228
GND on VCC "GND" (solid, remove dead copper, pour order 1025): 59,106.75 59,101 58.25,100.25 47.25,100.25 46.75,100.75 46.75,102 52.5,107.75 58,107.75
-12V on VCC "-12V" (solid, remove dead copper, pour order 1023): 74.25,98.02 74.25,92.5 74.5,92.25 76.25,92.25 76.75,91.75 76.75,90 76.25,89.5 71.5,89.5 66.75,94.25 66.75,94.75 69.75,94.75 73.02,98.02
V19D on VCC "V19D" (solid, remove dead copper, pour order 1021): 47.75,206.25 69.5,206.25 71.25,204.5 71.25,181.5 70,180.25 51.25,180.25 45.5,186 45.5,204
V33A on VCC "V33A" (solid, remove dead copper, pour order 1010): 33.75,191.5 43,191.5 44.5,190 44.5,186 52.75,177.75 52.75,167.25 51,165.5 34.75,165.5 33.25,167 33.25,191
V19D on VCC "V19D" (solid, remove dead copper, pour order 1006): 18 vertices, not listed, extent 27.75,135.5 51,204
+5V on VCC "+5V" (solid, remove dead copper, pour order 1025): 87.25,101 90.75,101 101,111.25 117,111.25 122.75,105.5 122.75,98.25 121.5,97 87.25,97 87,97.25 87,100.75
BUS- on VCC "BUS-" (solid, remove dead copper, pour order 1035): 51.5,55 50,56.5 50,64.25 49.25,65 45.5,65 45,64.5 45,56 50,51 57.25,51 57.5,51.25 57.5,54.75 57.25,55
V19D on VCC "V19D" (solid, remove dead copper, pour order 1003): 32.5,170.75 32.5,166.25 33.75,165 33.75,138.25 32.5,137 31,135.5 28.433,138.067 28.433,140.682 28.433,164.933 29.75,166.25
V33D on VCC "V33D" (solid, remove dead copper, pour order 1021): 34.5,138 31.25,134.75 31.25,131.75 34.25,128.75 42.75,128.75 60,146 59.75,146.25 59.75,164.75 36.5,164.75 34.5,162.75
+5V on VCC "+5V" (solid, remove dead copper, pour order 1022): 19 vertices, not listed, extent 14.75,118.875 49.25,206.298
NetDA8_1 on VCC "DA8-1" (solid, remove dead copper, pour order 1036): 43,49.75 47.5,45.25 56.5,45.25 57.5,44.25 57.5,41 56.75,40.25 48.75,40.25 42.25,46.75 23,46.75 22.5,47.25 16.25,47.25 15.5,48 15.5,49 16.25,49.75

## Keep-outs
Keep-Out Layer:
  pour cut-out: 136.534,17.034 134.664,15.164 131.501,15.164 131.501,12.999 132,12.5 136.75,12.5
  pour cut-out: 117.924,111 ccw(c132,111) 132,96.924 ccw(c132,111) 146.076,111 ccw(c132,111) 132,125.076 ccw(c132,111)
  pour cut-out: 121.823,5 ccw(c132,5) 132,-5.177 ccw(c132,5) 142.177,5 ccw(c132,5) 132,15.177 ccw(c132,5)
  pour cut-out: -4.142,5 ccw(c10,5) 10,-9.142 ccw(c10,5) 24.142,5 ccw(c10,5) 10,19.142 ccw(c10,5)
  pour cut-out: 47.649,79.25 ccw(c49.25,79.25) 49.25,77.649 ccw(c49.25,79.25) 50.851,79.25 ccw(c49.25,79.25) 49.25,80.851 ccw(c49.25,79.25)
  pour cut-out: 117.924,255 ccw(c132,255) 132,240.924 ccw(c132,255) 146.076,255 ccw(c132,255) 132,269.076 ccw(c132,255)

## Other copper
Top Layer:
  pour cut-out: 117,21.25 117,20.25 115.5,18.75 115.5,14 112.75,11.25 117.256,11.25 117.35,11.156 118,11.806 118,21.25
  pour cut-out: 67.75,189 69.25,189 69.5,189.25 69.5,188.25 69,187.75 68,187.75
  pour cut-out: 68.397,203.139 69.536,202 69.75,202 69.75,203.25 69.5,203.5
  pour cut-out: 66.75,203.5 68.768,203.5 68.948,203.319 68.948,204.052 68.25,204.75 68,204.5 66.5,204.5
  pour cut-out: 62.131,203.584 62.131,204.381 62.25,204.5 62.75,204.5 62.75,204.115 62.567,203.932
  pour cut-out: 64.25,204.5 64.25,203.5 63.75,203 63.75,204 63.5,204.25
  pour cut-out: 59.75,204.5 60.296,203.954 60.296,203.267 60.767,203.267 61.25,203.75 61.25,204.5
  pour cut-out: 109.8,174.287 109.8,171.05 109.75,171 108.5,172.25 108.5,173.25
  pour cut-out: 117.149,40.25 ccw(c118.75,40.25) 118.75,38.649 ccw(c118.75,40.25) 120.351,40.25 ccw(c118.75,40.25) 118.75,41.851 ccw(c118.75,40.25)
GND:
  pour cut-out: 131.46,82.658 135.511,82.658 136,83.147 136,55.358 135.016,56.342 130.908,56.342 130.5,56.75 131.462,56.75 132.999,58.287 132.999,81.327 131.817,82.51
  pour cut-out: 136,127.5 136,126.25 134.5,124.75 135.75,123.5 137,123.5
  pour cut-out: 101.25,43.5 113.25,43.5 113.25,35.25 108.25,30.25 99.5,30.25 99.056,30.694 99.056,41.306 101.25,43.5 101.25,44.25 101,44.25 98.25,41.5 98.25,30.25 99,29.5 109,29.5 114.5,35 114.5,42.75 113,44.25 101.25,44.25
  pour cut-out: 99.5,25.25 116,25.25 116.75,24.5 116.75,13.5 114,10.75 99.25,10.75 98.25,11.75 98.25,24.25 99.25,25.25 99.5,25.25 99.5,24.5 99.056,24.056 99.056,12.194 99.75,11.5 113.5,11.5 116,14 116,24 115.5,24.5 99.5,24.5
  pour cut-out: 121.86,5.999 121.86,1.86 121,1 123.75,1
  pour cut-out: 4,26 4,22.5 8.25,18.25 6.5,16.5 -0.25,16.5
  pour cut-out: 124.5,100.5 124.5,98 123.25,96.75 123.5,96.5 131.25,96.5
  pour cut-out: 13.5,238.5 13.25,238.25 13.25,226 12.75,225.5 8.5,225.5 8,225.25 8,237.5 9,238.5
  pour cut-out: 12.75,223 13.25,222.5 13.25,220.75 12.75,220.25 8.75,220.25 8.25,219.75 7.75,219.75 7.75,223.5 8,223.75 8.75,223
  pour cut-out: 12.75,217.92 13.25,217.42 13.25,215.67 12.75,215.17 8.75,215.17 8.25,214.67 7.75,214.67 7.75,218.42 8,218.67 8.75,217.92
  pour cut-out: 107.974,171.25 ccw(c109,171.25) 109,170.224 ccw(c109,171.25) 110.026,171.25 ccw(c109,171.25) 109,172.276 ccw(c109,171.25)
  pour cut-out: 109.224,175.25 ccw(c110.25,175.25) 110.25,174.224 ccw(c110.25,175.25) 111.276,175.25 ccw(c110.25,175.25) 110.25,176.276 ccw(c110.25,175.25)
  pour cut-out: 77.974,193.25 ccw(c79,193.25) 79,192.224 ccw(c79,193.25) 80.026,193.25 ccw(c79,193.25) 79,194.276 ccw(c79,193.25)
  pour cut-out: 74.974,194.5 ccw(c76,194.5) 76,193.474 ccw(c76,194.5) 77.026,194.5 ccw(c76,194.5) 76,195.526 ccw(c76,194.5)
  pour cut-out: 73.774,196.25 ccw(c74.8,196.25) 74.8,195.224 ccw(c74.8,196.25) 75.826,196.25 ccw(c74.8,196.25) 74.8,197.276 ccw(c74.8,196.25)
  pour cut-out: 78.724,189.5 ccw(c79.75,189.5) 79.75,188.474 ccw(c79.75,189.5) 80.776,189.5 ccw(c79.75,189.5) 79.75,190.526 ccw(c79.75,189.5)
  pour cut-out: 107.974,178.75 ccw(c109,178.75) 109,177.724 ccw(c109,178.75) 110.026,178.75 ccw(c109,178.75) 109,179.776 ccw(c109,178.75)
  pour cut-out: 107.974,177.5 ccw(c109,177.5) 109,176.474 ccw(c109,177.5) 110.026,177.5 ccw(c109,177.5) 109,178.526 ccw(c109,177.5)
VCC:
  pour cut-out: 136,127.5 136,126.25 134.5,124.75 135.75,123.5 137,123.5
  pour cut-out: 73.5,195 73.5,194 72,192.5 72,196.5
  pour cut-out: 123.75,9.75 118,4 118,2.75 125.5,2.75 126.5,3.75
  pour cut-out: 51.75,67.25 50.25,65.75 45.25,65.75 42,62.5 45,62 45,64.5 45.5,65 51.75,65
  pour cut-out: -4.02,98 ccw(c10,98) 10,83.98 ccw(c10,98) 24.02,98 ccw(c10,98) 10,112.02 ccw(c10,98)
  pour cut-out: 107.974,177.5 ccw(c109,177.5) 109,176.474 ccw(c109,177.5) 110.026,177.5 ccw(c109,177.5) 109,178.526 ccw(c109,177.5)
  pour cut-out: 107.974,178.75 ccw(c109,178.75) 109,177.724 ccw(c109,178.75) 110.026,178.75 ccw(c109,178.75) 109,179.776 ccw(c109,178.75)
  pour cut-out: 109.224,175.25 ccw(c110.25,175.25) 110.25,174.224 ccw(c110.25,175.25) 111.276,175.25 ccw(c110.25,175.25) 110.25,176.276 ccw(c110.25,175.25)
  pour cut-out: 107.974,171.25 ccw(c109,171.25) 109,170.224 ccw(c109,171.25) 110.026,171.25 ccw(c109,171.25) 109,172.276 ccw(c109,171.25)
  pour cut-out: 78.724,189.5 ccw(c79.75,189.5) 79.75,188.474 ccw(c79.75,189.5) 80.776,189.5 ccw(c79.75,189.5) 79.75,190.526 ccw(c79.75,189.5)
  pour cut-out: 73.774,196.25 ccw(c74.8,196.25) 74.8,195.224 ccw(c74.8,196.25) 75.826,196.25 ccw(c74.8,196.25) 74.8,197.276 ccw(c74.8,196.25)
  pour cut-out: 74.974,194.5 ccw(c76,194.5) 76,193.474 ccw(c76,194.5) 77.026,194.5 ccw(c76,194.5) 76,195.526 ccw(c76,194.5)
  pour cut-out: 77.974,193.25 ccw(c79,193.25) 79,192.224 ccw(c79,193.25) 80.026,193.25 ccw(c79,193.25) 79,194.276 ccw(c79,193.25)
  pour cut-out: 117.149,40.25 ccw(c118.75,40.25) 118.75,38.649 ccw(c118.75,40.25) 120.351,40.25 ccw(c118.75,40.25) 118.75,41.851 ccw(c118.75,40.25)
  pour cut-out: 43.209,197.25 ccw(c44,197.25) 44,196.459 ccw(c44,197.25) 44.791,197.25 ccw(c44,197.25) 44,198.041 ccw(c44,197.25)
  pour cut-out: 43.209,193.25 ccw(c44,193.25) 44,192.459 ccw(c44,193.25) 44.791,193.25 ccw(c44,193.25) 44,194.041 ccw(c44,193.25)
Bottom Layer:
  pour cut-out: 49.75,84.5 49.75,82.75 50.828,81.672 50.828,78.578 50.25,78 48.75,79.5 48.75,82.75
  pour cut-out: 49.75,90.75 50.25,90.25 50.25,86.25 49.5,85.5 49.75,86.75
  pour cut-out: 56,205 53.75,205 50.75,206.75 50,208 50,209 55.5,209 56.25,208.25
  pour cut-out: 46.5,206.75 46.5,207 46.75,207.25 48,207.25 48.25,207 48.25,205.5 49.75,207 50,207 50,208.5 49.5,209 48.775,208.275 45.75,208.275
  pour cut-out: 91.75,171.433 91.75,170.5 92.344,169.906 92.344,167.594 92.25,167.5 90.75,167.5 90.75,170.75 91.25,171.25
  pour cut-out: 93.059,176.052 92.2,175.193 92.2,174.05 91.25,175 91.5,175.25 91.5,175.75
  pour cut-out: 55.5,187.5 53.45,187.5 52.701,186.751 52.701,185.145 52.306,184.75 54.25,184.75 54.75,184.25 54.75,183.25 55.5,184
  pour cut-out: 62.75,205.25 65.5,205.25 65.5,208.5 62.75,208.5
  pour cut-out: 51.061,207.081 51.061,205.311 51,205.25 51.75,205.25 51.75,207.263 51.549,207.465
  pour cut-out: 117.149,40.25 ccw(c118.75,40.25) 118.75,38.649 ccw(c118.75,40.25) 120.351,40.25 ccw(c118.75,40.25) 118.75,41.851 ccw(c118.75,40.25)
  pour cut-out: 71.7,188.25 ccw(c72.5,188.25) 72.5,187.45 ccw(c72.5,188.25) 73.3,188.25 ccw(c72.5,188.25) 72.5,189.05 ccw(c72.5,188.25)

## Silkscreen, mask and mechanical layers (free items; w line width, h text height)
Top Overlay:
  drawing of 302 lines, arcs and shapes, not listed
  text "C" at 129,248.75 h2
  text "C" at 104.75,244.5 h2
  text "B" at 34.5,244 h2
  text "7" at 51.5,231.25 h1
  text "6" at 54,231.25 h1
  text "5" at 56.5,231.25 h1
  text "A" at 32.75,220.25 h2
  text "2" at 51.25,216.25 h1
  text "3" at 54,216.25 h1
  text "4" at 56.5,216.25 h1
  text "B" at 74.5,215.5 h2
  text "A" at 62.5,215 h2
  text "120" at 72.75,196.75 h0.8
  text "20" at 42.1,194 h0.8
  text "30" at 42.1,189 h0.8
  text "100" at 72.5,186.75 h0.8
  text "70" at 97.75,180.75 h0.8
  text "45" at 47.75,177.75 h0.8
  text "70" at 59.5,177.5 h0.8
  text "88" at 68.5,177.5 h0.8
  text "10" at 87.75,171.75 h0.8
  text "50" at 106.5,170.5 h0.8
  text "20" at 87.75,166.75 h0.8
  text "21" at 92.5,162.25 h0.8
  text "30" at 97,162 h0.8
  text "+12V" at 8,85.25 h1
  text "-12V" at 12.5,85.25 h1
  text "FAN3" at 136.5,77 h1.2 r90
  text "FAN2" at 136.5,68.75 h1.2 r90
  text "FAN1" at 136.5,60.5 h1.2 r90
  text "BUS+" at 39.75,10.5 h1.5
  text "BUS-" at 66.25,10.5 h1.5
  text "150-203005-2" at 67.25,3.25 h1.5
  text "(D)" at 15,2.25 h1.5
  text "V1.1" at 78.75,1 h1.5
Bottom Overlay:
  drawing of 243 lines, arcs and shapes, not listed
Top Solder:
  region: 101.5,177 101.75,176.75 101.75,169 101.25,168.5 93.5,168.5 93,169 93,175.75 94.25,177
  region: 51.25,201.25 65.5,201.25 66.5,200.25 66.5,184.5 65.5,183.5 51,183.5 50.25,184.25 50.25,200.25
Bottom Solder:
  region: 72.5,84.25 67.25,89.5 59.414,89.5 58,88.086 58,79.25 57.5,78.75 55.5,78.75 54.5,77.75 54.5,75 57.5,72 65.25,72 67.5,74.25 71.75,74.25 72.5,75
  region: 54.25,107 54.25,104.5 55,103.75 57.5,103.75 58.5,102.75 58.5,100.75 58,100.25 46.5,100.25 45.5,101.25 48.5,101.25
  region: 101.25,174.25 101.75,173.75 101.75,169.25 101.25,168.75 96.25,168.75 94.5,170.5 94.5,174 94.75,174.25
  region: 51.359,199.5 52.943,197.916 52.943,190.943 52.25,190.25 50.75,190.25 50.25,190.75 50.25,195.75 49.75,196.25 48.25,196.25 48,196.5 48,199.25 48.25,199.5
  region: 59,201.75 59.75,201 59.75,199.5 60.5,198.75 60,198.25 55.25,198.25 52.75,200.75 52.75,201.5 53,201.75
  region: 62.5,199 63.25,198.25 63.25,190.5 62.75,190 56.25,190 55.25,191 55.25,198.25 56,199
  region: 102.25,26.75 114.5,26.75 116,25.25 116,12 115.5,11.5 101.75,11.5 101,12.25 101,25.5
  region: 101.25,43.5 112.25,43.5 113,42.75 113,35 111.5,33.5 111.5,28.75 110.5,27.75 101.5,27.75 101,28.25 101,36 99,38 99,41.25
  region: 48.25,108.5 49,107.75 53.5,107.75 54.25,107 54.25,101 53.5,100.25 46.5,100.25 45.5,101.25 45.5,103.5 43.75,105.25
  region: 42,115.75 47.5,115.75 48.25,115 48.25,106.75 46.75,105.25 41.25,105.25 40.5,104.5 29,104.5 28.25,105.25 28.25,110.5 29.5,111.75 40.75,111.75 42,113
Mechanical 1:
  lines w0.2: 5,0 137,0 ; 5,0 5,260 ; 5,0 2,0 cw(c2,2) 0,2 0,258 cw(c2,258) 2,260 5,260 ; 5,260 137,260 ; 137,0 137,260 ; 137,0 137,260 ; 137,0 269,0 ; 137,260 269,260 ; 269,0 269,260 ; 269,0 272,0 ccw(c272,2) 274,2 274,258 ccw(c272,258) 272,260 269,260 ; 13,44.75 19,44.75 20,43.75 20,38.5 20,34.75 22,34.75 22,44.75 20,46.75 13,46.75 13,44.75 ; 13,50.25 13,52.25 19,52.25 20,53.25 20,58.5 20,62.25 22,62.25 22,52.25 20,50.25 13,50.25 ; 86.5,40.5 93,47 93,65 95,65 95,46 88,39 86.5,40.5 ; 92,91 92,93 126,93 126,91 92,91 ; 145,44.75 145,46.75 152,46.75 154,44.75 154,34.75 152,34.75 152,38.5 152,43.75 151,44.75 145,44.75 ; 145,50.25 152,50.25 154,52.25 154,62.25 152,62.25 152,58.5 152,53.25 151,52.25 145,52.25 145,50.25 ; 218.5,40.5 220,39 227,46 227,65 225,65 225,47 218.5,40.5 ; 224,91 258,91 258,93 224,93 224,91
  text ".Printout_Name" at 120.5,-20 h2